# EAGLE board Bodacious Uusam (EAGLE 9.7.0)

Size 164.26 x 82.4 mm. Coordinates in mm from the lower left corner, seen from the top.
Outline: 0,0 164.26,0 164.26,82.4 0,82.4 0,0
Copper layers (1*16): Top 0.035mm / dielectric 1.5mm / Bottom 0.035mm
Design rules "default": minimum track width 6mil, minimum drill 0.35mm, track to track 6mil, track to pad 6mil, pad to pad 6mil, via to via 6mil, smd to smd 6mil, copper to edge 40mil, drill to drill 6mil, minimum pad ring 10mil, minimum via ring 8mil, stop-mask expansion 4mil, vias tented up to drill 0mil, thermal gap 10mil

## Footprints (pad centres in the part's own frame; a part is rotated, then mirrored left to right if it is on the bottom)
LEDRD254W60D565H860B_Y = drill 0.981 pad 1.581: 1 -1.27,0; 2 1.27,0
LEDRD254W60D565H860B = drill 0.981 pad 1.581: 1 -1.27,0; 2 1.27,0
LEDRD254W60D565H860B_G = drill 0.981 pad 1.581: 1 -1.27,0; 2 1.27,0
WS2812-STRIP = drill 1.016 long: 1 -3.81,0; 2 -1.27,0; 3 1.27,0; 4 3.81,0
RESAD1016W63L850D250B = drill 0.83 pad 1.43: 1 -5.08,0; 2 5.08,0
ARDUINO-UNO-R3-SHIELD = drill 1.016 pad 1.88: 3.3V 24.13,-2.54; 5V 24.13,0; A0 24.13,12.7; A1 24.13,15.24; A2 24.13,17.78; A3 24.13,20.32; A4 24.13,22.86; A5 24.13,25.4; AREF -24.13,-13.97; D2 -24.13,20.32; D3 -24.13,17.78; D4 -24.13,15.24; D5 -24.13,12.7; D6 -24.13,10.16; D7 -24.13,7.62; D8 -24.13,3.81; D9 -24.13,1.27; D10 -24.13,-1.27; D11 -24.13,-3.81; D12 -24.13,-6.35; D13 -24.13,-8.89; GND@0 24.13,2.54; GND@1 24.13,5.08; GND@2 -24.13,-11.43; IOREF 24.13,-7.62; NC 24.13,-10.16; RES 24.13,-5.08; RX -24.13,25.4; SCL -24.13,-19.05; SDA -24.13,-16.51; TX -24.13,22.86; VIN 24.13,7.62

## Placement (x,y rotation side)
DLED_AMARILLO  YELLOW  [LEDRD254W60D565H860B_Y]  100.04,46.53 180 top
DLED_ROJO  RED  [LEDRD254W60D565H860B]  133.06,46.53 180 top
DLED_VERDE  GREEN  [LEDRD254W60D565H860B_G]  77.18,46.53 180 top
LED1  WS2812B_STRIP  [WS2812-STRIP]  157.99,37.93 270 top
R1  220  [RESAD1016W63L850D250B]  139.41,26.21 0 top
R2  220  [RESAD1016W63L850D250B]  106.39,26.21 0 top
R3  220  [RESAD1016W63L850D250B]  83.53,26.21 0 top
U1  ARDUINO-UNO-R3-SHIELD  [ARDUINO-UNO-R3-SHIELD]  29.84,34.52 180 top

## Library data of the parts
DLED_AMARILLO = Tinkercad; CATEGORY: Opto-Electronic; SUB-CATEGORY: LED; VALUE: LED_YELLOW
DLED_ROJO = Tinkercad; CATEGORY: Opto-Electronic; SUB-CATEGORY: LED; VALUE: LED_RED
DLED_VERDE = Tinkercad; CATEGORY: Opto-Electronic; SUB-CATEGORY: LED; VALUE: LED_GREEN
LED1 R1-R3 U1 = Tinkercad

## Nets
DLED_AMARILLO_A: DLED_AMARILLO.1 R2.1
DLED_ROJO_A: DLED_ROJO.1 R1.1
DLED_VERDE_A: DLED_VERDE.1 R3.1
U1_5V: LED1.2 U1.5V
U1_D6: R2.2 U1.D6
U1_D7: R3.2 U1.D7
U1_D8: R1.2 U1.D8
U1_D9: LED1.1 U1.D9
U1_GND: DLED_AMARILLO.2 DLED_ROJO.2 DLED_VERDE.2 LED1.3 U1.GND@0 U1.GND@1 U1.GND@2

## Tracks (layer width: path | path; a pad name or v marks a point on that pad's centre or on a via)
DLED_AMARILLO_A  (1 unrouted)
DLED_ROJO_A  (1 unrouted)
DLED_VERDE_A  (1 unrouted)
U1_5V  (1 unrouted)
U1_D6  (1 unrouted)
U1_D7  (1 unrouted)
U1_D8  (1 unrouted)
U1_D9  (1 unrouted)
U1_GND  (6 unrouted)